# EAGLE board MOSFET (EAGLE 7.5.0)
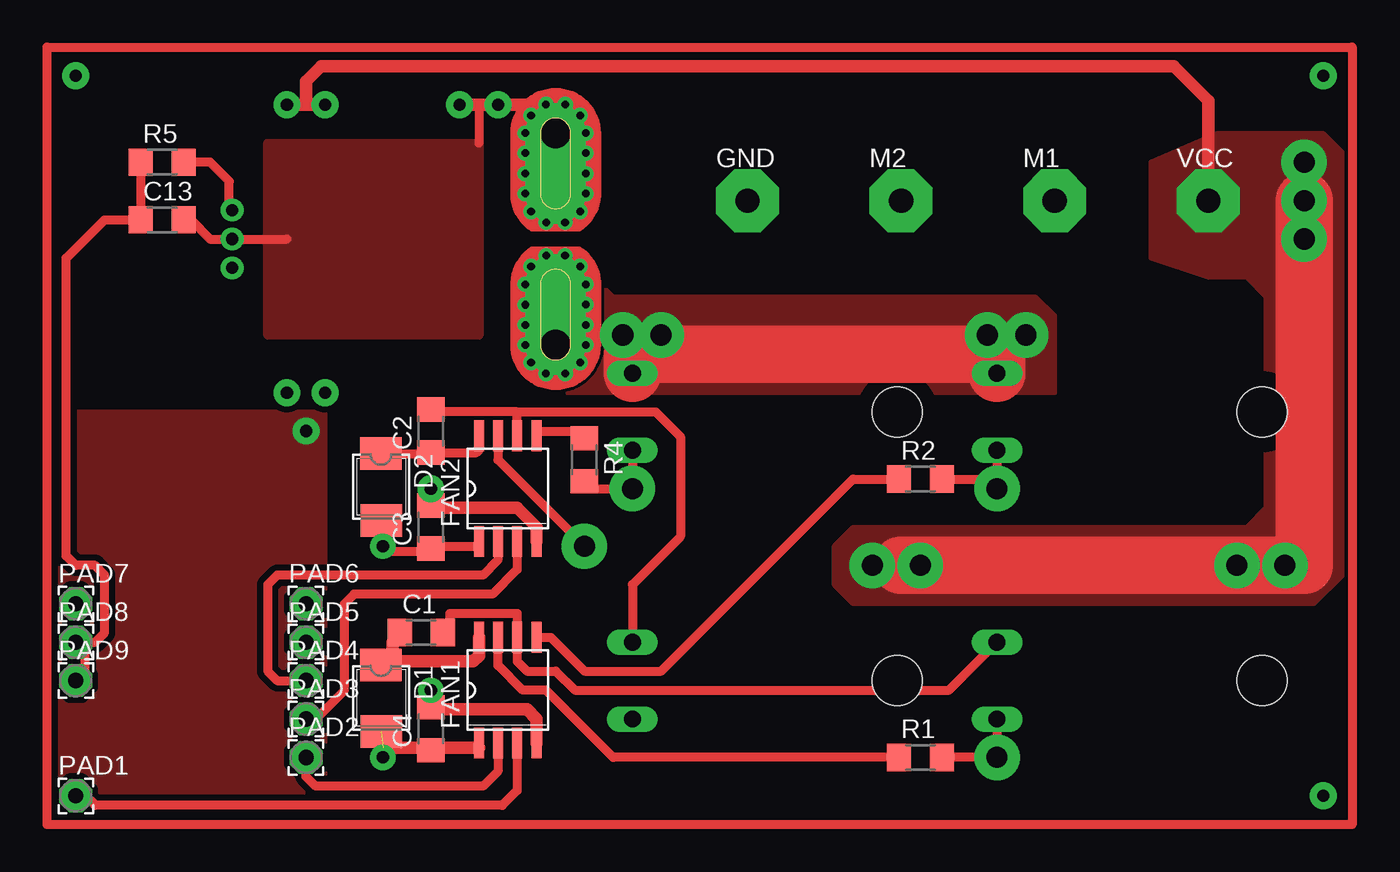
[diagram p0: board, top side]
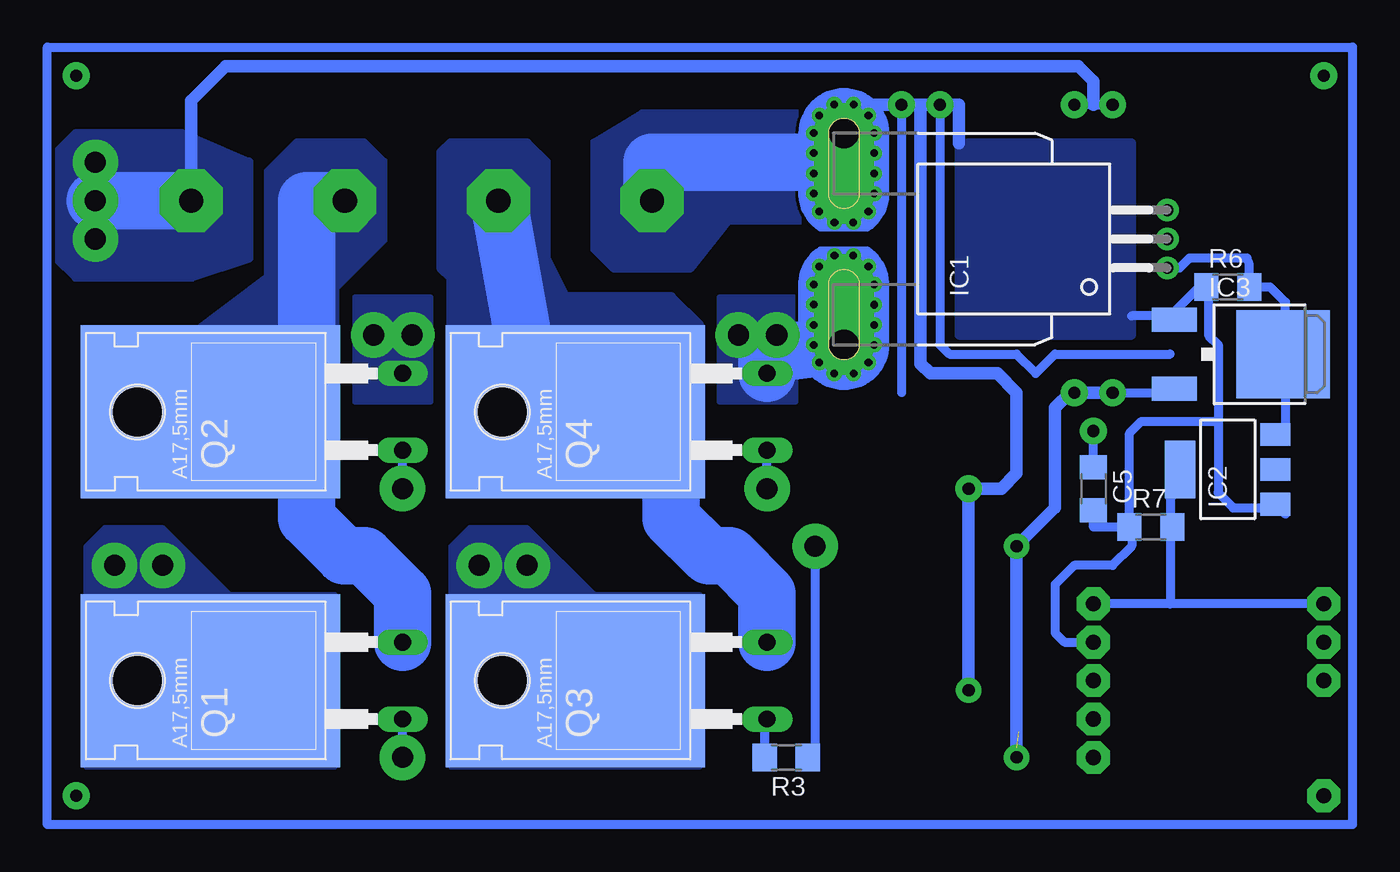
[diagram p1: board, bottom side, seen from below]

No outline drawn. Coordinates in mm, seen from the top.
Copper layers (1*16): Top 0.035mm / dielectric 1.5mm / Bottom 0.035mm
Design rules "default": minimum track width 10mil, minimum drill 24mil, track to track 8mil, track to pad 8mil, pad to pad 8mil, via to via 8mil, smd to smd 8mil, copper to edge 40mil, drill to drill 8mil, minimum pad ring 10mil, minimum via ring 8mil, stop-mask expansion 4mil, vias tented up to drill 0mil, thermal gap 10mil

## Footprints (pad centres in the part's own frame; a part is rotated, then mirrored left to right if it is on the bottom)
R1206 = smd 1.6 x 1.803: 1 -1.422,0; 2 1.422,0
SMB = smd 2.159 x 2.743: 1 -2.311,-0.127; 2 2.108,-0.102
8-SOP = smd 0.66 x 2.032: 1 -1.905,-3.498; 2 -0.635,-3.498; 3 0.635,-3.498; 4 1.905,-3.498; 5 1.905,3.498; 6 0.635,3.498; 7 -0.635,3.498; 8 -1.905,3.498
4,16O1,6 = drill 1.6 pad 4.166 octagon: 1 0,0
ACS75050 = drill 0.8 pad 1.5: 1 -1.91,-21.4; 2 0,-21.4; 3 1.91,-21.4 | drill 2 pad 4 offset: IP+ 7,0; IP- -7,0 | drill 0.5 pad 0.9: IP+@2 8.89,-0.635; IP+@3 8.89,0.635; IP+@4 8.175,1.625; IP+@5 7,2; IP+@6 5.675,2; IP+@7 4.325,2; IP+@8 3,2; IP+@9 1.825,1.625; IP+@10 1.1,0.625; IP+@11 1.1,-0.625; IP+@12 1.825,-1.625; IP+@13 3,-2; IP+@14 4.325,-2; IP+@15 5.675,-2; IP+@16 7,-2; IP+@17 8.175,-1.625; IP-@2 -8.89,-0.635; IP-@3 -8.89,0.635; IP-@4 -8.175,1.625; IP-@5 -7,2; IP-@6 -5.675,2; IP-@7 -4.325,2; IP-@8 -3,2; IP-@9 -1.825,1.625; IP-@10 -1.1,0.625; IP-@11 -1.1,-0.625; IP-@12 -1.825,-1.625; IP-@13 -3,-2; IP-@14 -4.35,-2; IP-@15 -5.675,-2; IP-@16 -7,-2; IP-@17 -8.175,-1.625
SOT223 = smd 1.5 x 2: 1 -2.3,-3.15; 2 0,-3.15; 3 2.3,-3.15 | smd 3.8 x 2: 4 0,3.15
DPACK = smd 1.6 x 3: 1 -2.28,-4.8; 3 2.28,-4.8 | smd 5.8 x 6.2: 4 0,2.38
2,15/1,0 = drill 1.016 pad 2.159 octagon: 1 0,0
TO220_MODIFY = drill 1.118 long: 1 -2.54,-11.43; 3 2.54,-11.43 | smd 11.43 x 17.15: P$1 0,1.27 | hole 3.302: 0,6.096

## Placement (x,y rotation side)
C1  0.1u  [R1206]  25.4,13.34 0 top
C2  0.1u  [R1206]  26.04,26.67 90 top
C3  0.1u  [R1206]  26.04,20.32 90 top
C4  0.1u  [R1206]  26.04,6.99 90 top
C5  0.1u  [R1206]  17.78,22.86 270 bottom
C13  0.1u  [R1206]  8.26,40.64 0 top
D1  [SMB]  22.86,8.89 270 top
D2  [SMB]  22.86,22.86 270 top
FAN1  [8-SOP]  31.11,9.53 0 top
FAN2  [8-SOP]  31.11,22.86 0 top
GND  WIREPAD4,16O1,6  [4,16O1,6]  46.99,41.91 0 top
IC1  ACS750SCA-050  [ACS75050]  34.29,39.37 90 bottom
IC2  LD117AS33TR  [SOT223]  8.89,24.13 90 bottom
IC3  LD117ADT50TR  [DPACK]  7.62,31.75 270 bottom
M1  WIREPAD4,16O1,6  [4,16O1,6]  67.31,41.91 0 top
M2  WIREPAD4,16O1,6  [4,16O1,6]  57.15,41.91 0 top
PAD1  [2,15/1,0]  2.54,2.54 0 top
PAD2  [2,15/1,0]  17.78,5.08 0 top
PAD3  [2,15/1,0]  17.78,7.62 0 top
PAD4  [2,15/1,0]  17.78,10.16 0 top
PAD5  [2,15/1,0]  17.78,12.7 0 top
PAD6  [2,15/1,0]  17.78,15.24 0 top
PAD7  [2,15/1,0]  2.54,15.24 0 top
PAD8  [2,15/1,0]  2.54,12.7 0 top
PAD9  [2,15/1,0]  2.54,10.16 0 top
Q1  SUP75N06_MODIFY  [TO220_MODIFY]  74.93,10.16 90 bottom
Q2  SUP75N06_MODIFY  [TO220_MODIFY]  74.93,27.94 90 bottom
Q3  SUP75N06_MODIFY  [TO220_MODIFY]  50.8,10.16 90 bottom
Q4  SUP75N06_MODIFY  [TO220_MODIFY]  50.8,27.94 90 bottom
R1  10R  [R1206]  58.42,5.08 0 top
R2  10R  [R1206]  58.42,23.5 0 top
R3  10R  [R1206]  38.1,5.08 180 bottom
R4  10R  [R1206]  36.2,24.77 270 top
R5  1.6  [R1206]  8.26,44.45 0 top
R6  10R  [R1206]  8.89,36.2 0 bottom
R7  10R  [R1206]  13.97,20.32 0 bottom
VCC  WIREPAD4,16O1,6  [4,16O1,6]  77.47,41.91 0 top

## Library data of the parts
C1-C5 C13 R1-R7 = rcl
D1 D2 = semicon-smd-ipc
FAN1 FAN2 = wooddy
GND M1 M2 PAD1-PAD9 VCC = wirepad
IC1 = allegro; MF: ALLEGRO MICROSYSTEMS, INC.; MPN: ACS750SCA-050; OC_FARNELL: 1457175; OC_NEWARK: 81H6588
IC2 IC3 = v-reg
Q1-Q4 = transistor-fet

## Nets
3V3: IC2.4 R7.2
5V: IC1.1 IC2.3 IC3.4 R6.2
12V: C3.1 C4.1 D1.2 D2.2 FAN1.1 FAN2.1 IC3.3
CURRENT: IC1.IP- IC1.IP-@2 IC1.IP-@3 IC1.IP-@4 IC1.IP-@5 IC1.IP-@6 IC1.IP-@7 IC1.IP-@8 IC1.IP-@9 IC1.IP-@10 IC1.IP-@11 IC1.IP-@12 IC1.IP-@13 IC1.IP-@14 IC1.IP-@15 IC1.IP-@16 IC1.IP-@17 Q2.3 Q4.3
G2: Q2.1 R2.2
G4: Q4.1 R4.2
GND: C3.2 C4.2 C5.2 C13.2 FAN1.4 FAN2.4 GND.1 IC1.2 IC1.IP+ IC1.IP+@2 IC1.IP+@3 IC1.IP+@4 IC1.IP+@5 IC1.IP+@6 IC1.IP+@7 IC1.IP+@8 IC1.IP+@9 IC1.IP+@10 IC1.IP+@11 IC1.IP+@12 IC1.IP+@13 IC1.IP+@14 IC1.IP+@15 IC1.IP+@16 IC1.IP+@17 IC2.1 IC3.1 R6.1 R7.1
H1IN: FAN1.2
H2IN: FAN2.2
ICURRENT: C13.1 R5.1
L1IN: FAN1.3
L2IN: FAN2.3
MOTOR1: C1.2 FAN1.6 M1.1 Q1.3 Q2.P$1
MOTOR2: C2.2 FAN2.6 M2.1 Q3.3 Q4.P$1
N$1: C2.1 D2.1 FAN2.8
N$2: FAN2.5 R4.1
N$3: FAN2.7 R3.1
N$4: Q1.1 R1.2
N$5: Q3.1 R3.2
N$8: C1.1 D1.1 FAN1.8
N$10: IC1.3 R5.2
N$12: FAN1.5 R2.1
N$13: FAN1.7 R1.1
VCC: Q1.P$1 Q3.P$1 VCC.1

## Tracks (layer width: path | path; a pad name or v marks a point on that pad's centre or on a via)
3V3
  Bottom 0.61: IC2.4 12.04,22.89 12.7,22.23 12.7,20.47 R7.2
5V
  Bottom 0.61: IC2.3 5.32,26.43 5.08,26.67 5.08,31.59 IC3.4 5.24,34.13 5.08,34.29 5.08,35.2 6.08,36.2 R6.2 7.47,37.73 7.62,38.1 11.43,38.1 12.07,37.46 IC1.1
12V  (via drill 0.8 pad 1.68, 0.8 pad 1.78)  (1 unrouted)
  Top 0.61: 25.88,5.71 C4.1 26.19,5.71 | D2.2 22.86,20.65 v22.86,19.05 23.18,18.73 25.72,18.73 | 25.72,18.73 26.04,19.05 29.21,19.05 FAN2.1 | C3.1 25.88,19.05 25.4,19.05 25.72,18.73 | 29.21,5.71 FAN1.1 | 22.86,5.71 v22.86,5.08
  Top 0.813: 25.88,5.71 22.86,5.71 | 26.19,5.71 29.21,5.71
  Bottom 0.61: v19.05,29.21 19.32,29.21 | v16.51,29.21 12.7,29.21 12.44,29.47 IC3.3
  Bottom 0.813: v22.86,5.08 v22.86,19.05 20.32,21.59 20.32,28.21 19.32,29.21 | v16.51,29.21 v19.05,29.21
CURRENT  (via drill 1.4 pad 3)
  Top 3.81: Q4.3 39.37,31.75 63.5,31.75 Q2.3
  Bottom 3.81: Q4.3 39.37,31.75 IC1.IP-
  other vias: 41.27,33.02 38.73,33.02 62.87,33.02 65.41,33.02
  pour Bottom (no thermals): 42.55,35.56 42.55,28.57 37.47,28.57 37.47,35.56
  pour Bottom (no thermals): 61.59,35.56 66.67,35.56 66.67,28.57 61.59,28.57
  pour Top (no thermals): 33.02,38.1 35.56,38.1 38.1,35.56 66.04,35.56 67.31,34.29 67.31,29.21 34.29,29.21 33.02,30.48
G2  (via drill 1.4 pad 3)
  Top 0.61: R2.2 62.87,23.5 v63.5,22.86 Q2.1
  Bottom 0.61: v63.5,22.86 Q2.1
G4  (via drill 1.4 pad 3)
  Top 0.61: R4.2 36.2,22.86 v39.37,22.86 Q4.1
  Bottom 0.61: v39.37,22.86 Q4.1
GND  (via drill 0.8 pad 1.68, 0.8 pad 1.78)
  Top 0.61: C4.2 26.19,8.26 26.04,8.26 | C3.2 25.55,21.59 27.04,21.59 26.04,22.59 v26.04,22.86 | 34.29,48.26 34.29,45.72 | 29.21,48.26 29.21,45.72 | 12.7,39.37 IC1.2 | IC1.2 16.51,39.37 | C13.2 10.16,40.64 11.43,39.37 IC1.2
  Top 0.813: FAN1.4 33.02,7.62 32.38,8.26 26.19,8.26 | FAN2.4 33.02,20.32 31.75,21.59 27.04,21.59 | 26.04,8.26 v26.04,9.53 | v26.04,22.86 C3.2 | v27.94,48.26 29.21,48.26 v30.48,48.26 34.29,48.26
  Bottom 0.61: 34.29,48.26 34.29,45.72 | v27.94,48.26 27.94,32.38 27.3,31.75 22.86,31.75 21.59,30.48 20.32,31.75 12.7,31.75 | IC1.2 15.24,39.37 | IC2.1 5.29,21.38 | 5.29,21.38 5.08,21.17 | IC3.1 12.16,34.29 12.7,34.29 | 9.53,27.3 9.53,32.38 10.16,33.02 10.16,35.56 10.31,35.71 R6.1 10.79,36.2 12.7,34.29 | 9.53,27.3 9.53,22.59 8.53,21.59 6.35,21.59 6.14,21.38 5.29,21.38 | 12.7,34.29 15.24,34.29 | v30.48,48.26 30.48,29.21 | 9.53,27.3 14.61,27.3 15.39,26.52 R7.1 17.78,20.32 C5.2
  Bottom 0.813: v26.04,9.53 v26.04,22.86 23.86,22.86 22.86,23.86 22.86,29.21 24.13,30.48 28.57,30.48 29.21,31.11 29.21,48.26 | 29.21,48.26 v27.94,48.26 26.67,48.26 26.67,45.72 | 29.21,48.26 v30.48,48.26 34.29,48.26
  Bottom 3.81: GND.1 46.99,44.45 34.29,44.45 34.29,45.72 IC1.IP+
  pour Bottom (no thermals): 35.56,47.62 47.62,47.62 50.8,45.72 50.8,38.73 49.53,37.47 44.45,37.47 41.91,40.64 32.38,40.64 31.75,41.27 31.75,46.99
  pour Top: 15.24,45.72 29.21,45.72 29.21,33.02 15.24,33.02
  pour Bottom: 15.24,45.72 26.67,45.72 26.67,33.02 15.24,33.02
GND2  (via drill 0.8 pad 1.78)
  Bottom 0.61: 17.78,24.13 v17.78,26.67
  pour Top (isolate 0.4): 1.27,1.27 19.05,1.27 19.05,27.94 1.27,27.94 arc1
ICURRENT
  Top 0.61: R5.1 C13.1
MOTOR1
  Top 0.61: Q1.3 60.33,9.53 35.56,9.53 34.29,10.79 32.38,10.79 31.75,11.43 FAN1.6 31.75,14.61 27.3,14.61 27.3,13.34 | C1.2 26.82,13.82 27.3,13.34 | 27.3,12.7 27.3,13.34
  Bottom 3.81: M1.1 69.85,41.91 69.85,27.94 | 69.85,27.94 Q2.P$1 | Q1.3 63.5,15.91 66,18.41 67.35,18.41 69.85,20.91 69.85,27.94
  pour Bottom (no thermals): 67.94,22.86 67.94,36.2 64.77,39.37 64.77,44.45 66.04,45.72 70.48,45.72 72.39,43.81 72.39,36.83 77.47,33.02 84.45,33.02 84.45,22.86
MOTOR2
  Top 0.61: FAN2.6 31.75,27.94 | 31.75,27.94 40.91,27.94 42.55,26.3 42.55,19.68 39.37,16.51 Q3.3 | 25.88,28.09 C2.2 26.19,27.94 31.75,27.94
  Bottom 3.81: M2.1 54.61,27.94 Q4.P$1 45.72,27.94 45.72,20.91 43.22,18.41 41.87,18.41 39.37,15.91 Q3.3
  pour Bottom (no thermals): 43.81,33.66 45.72,35.56 52.7,35.56 53.98,38.1 53.98,44.45 55.24,45.72 60.33,45.72 60.96,45.09 60.96,37.47 60.33,36.83 60.33,22.86 43.81,22.86
N$1
  Top 0.61: 29.21,26.67 FAN2.8 29.21,25.4 29.06,25.25 C2.1 25.96,25.17 D2.1
N$2
  Top 0.61: FAN2.5 33.02,26.67 36.2,26.67 R4.1
N$3  (via drill 1.4 pad 3)
  Top 0.61: FAN2.7 30.48,24.77 v36.2,19.05
  Bottom 0.61: v36.2,19.05 36.2,4.93 R3.1
N$4  (via drill 1.4 pad 3)
  Top 0.61: R1.2 v63.5,5.08 Q1.1
  Bottom 0.61: v63.5,5.08 Q1.1
N$5
  Bottom 0.61: R3.2 39.52,7.47 Q3.1
N$6  (via drill 0.8 pad 1.68)
  other vias: 26.04,22.86
N$7  (via drill 0.8 pad 1.68)
  other vias: 26.04,9.53
N$8
  Top 0.61: 29.21,12.7 FAN1.8 | D1.1 22.86,11.07 22.23,10.53 22.59,11.43 23.5,11.43 | 23.5,12.7 23.98,12.85 C1.1
  Top 0.813: 23.5,12.7 23.5,11.43 28.84,11.43 29.21,11.79 FAN1.8
N$9
  Top 0.61: 30.48,19.05 30.48,18.14 29.48,17.14 15.88,17.14 15.24,16.51 15.24,10.79 15.88,10.16 17.14,10.16
N$10
  Top 0.61: IC1.3 12.7,41.47 12.7,43.18 11.43,44.45 R5.2
N$11
  Bottom 0.61: 3.17,15.24 12.7,15.24 | 12.7,15.24 17.14,15.24 | 12.7,20.32 12.7,15.24
N$12
  Top 0.61: FAN1.5 33.97,13.02 36.2,10.79 41.27,10.79 53.98,23.5 R2.1
N$13
  Top 0.61: R1.1 38.1,5.08 33.66,9.53 32.12,9.53 30.48,11.16 FAN1.7
N$14  (via drill 1.4 pad 3)
  other vias: 39.37,22.86
N$15  (via drill 1.4 pad 3)
  other vias: 63.5,22.86
N$16  (via drill 1.4 pad 3)
  other vias: 83.82,41.91
N$17
  Top 0.61: 30.48,5.71 30.48,4.17 29.48,3.17 18.41,3.17 17.78,3.81 17.78,4.45
N$18
  Top 0.61: 31.75,5.08 31.75,2.9 30.75,1.91 3.81,1.91 3.17,2.54
N$19
  Bottom 0.61: 15.24,20.32 15.24,19.05 16.51,17.78 19.05,17.78 20.32,16.51 20.32,13.34 19.68,12.7 18.41,12.7
N$20
  Top 0.61: 18.41,7.62 20.32,9.53 20.32,15.24 20.95,15.88 30.11,15.88 31.75,17.51 31.75,19.05
N$21
  Bottom 0.61: 0.64,0.64 87,0.64 87,52.07 0.64,52.07 0.64,0.64
N$22  (via drill 0.8 pad 1.78)
  other vias: 2.54,50.16
N$23  (via drill 0.8 pad 1.78)
  other vias: 85.09,2.54
N$24  (via drill 0.8 pad 1.78)
  other vias: 85.09,50.16
N$25
  Top 0.61: 0.64,52.07 87,52.07 87,0.64 0.64,0.64 0.64,52.07
N$26
  Top 0.61: 2.54,10.16 3.17,10.16 3.17,12.7 3.81,12.7 4.45,13.34 4.45,17.14 3.81,17.78 2.54,17.78 1.91,18.41 1.91,38.1 4.45,40.64 6.99,40.64
N$27  (via drill 1.4 pad 3)
  other vias: 36.2,19.05
N$28  (via drill 1.4 pad 3)
  other vias: 63.5,5.08
VCC  (via drill 0.8 pad 1.78, 1.4 pad 3)
  Top 0.61: 17.78,48.26 v16.51,48.26
  Top 0.813: VCC.1 77.47,48.53 75.2,50.8 18.78,50.8 17.78,49.8 17.78,48.26 | v16.51,48.26 v19.05,48.26
  Top 3.81: v83.82,41.91 83.82,17.78 57.15,17.78
  Bottom 0.61: 17.78,48.26 v16.51,48.26 v19.05,48.26
  Bottom 0.813: VCC.1 77.47,48.53 75.2,50.8 18.78,50.8 17.78,49.8 17.78,48.26
  Bottom 3.81: VCC.1 v83.82,41.91
  other vias: 83.82,39.37 83.82,44.45 79.38,17.78 82.55,17.78 55.24,17.78 58.42,17.78
  pour Bottom (no thermals): 78.11,46.35 73.66,44.45 73.66,38.1 77.47,36.83 85.09,36.83 86.36,38.1 86.36,45.09 85.09,46.35
  pour Bottom (no thermals): 67.94,15.88 74.93,15.88 79.38,20.32 83.19,20.32 84.45,19.05 84.45,4.45 67.94,4.45
  pour Bottom (no thermals): 60.33,19.05 60.33,4.45 43.81,4.45 43.81,15.88 50.8,15.88 55.24,20.32 59.05,20.32
  pour Top (no thermals): 73.66,44.45 78.11,46.35 85.09,46.35 86.36,45.09 86.36,17.14 84.45,15.24 53.98,15.24 52.7,16.51 52.7,19.05 53.98,20.32 80.01,20.32 81.28,21.59 81.28,35.56 80.01,36.83 77.47,36.83 73.66,38.1